# EAGLE board board (EAGLE 5.11)
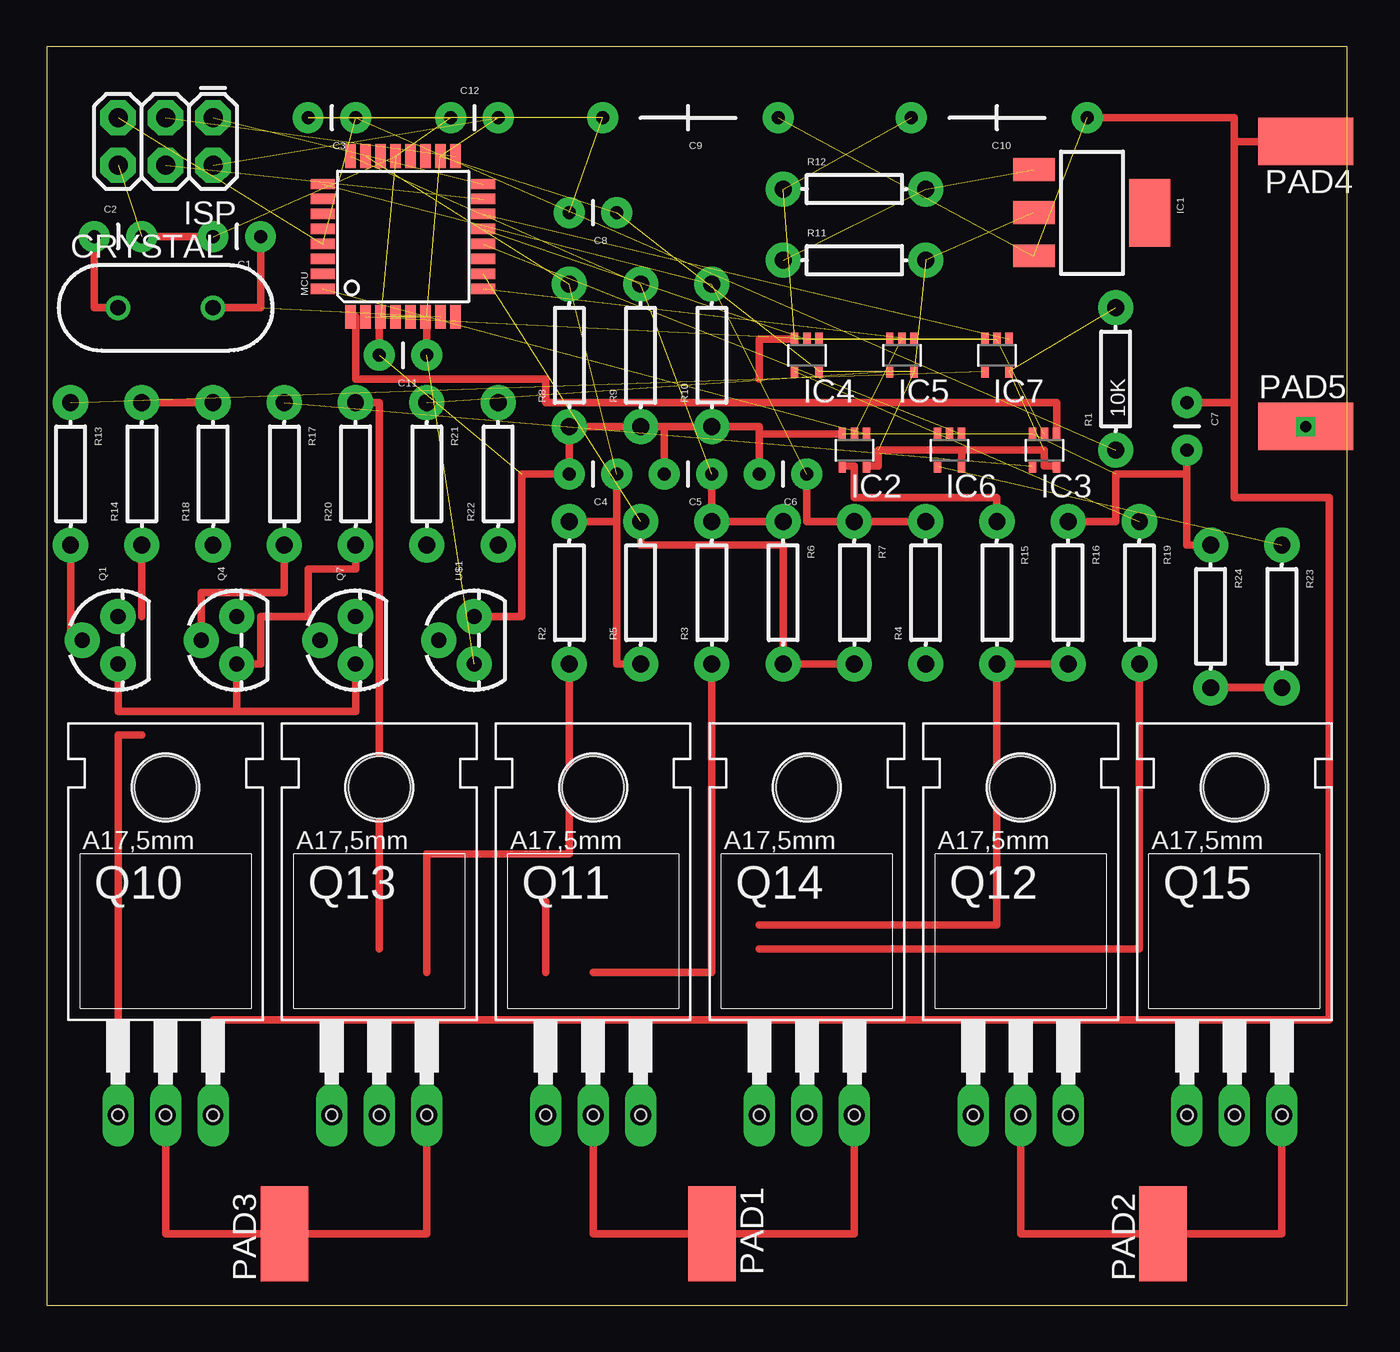
[diagram p0: board, top side]
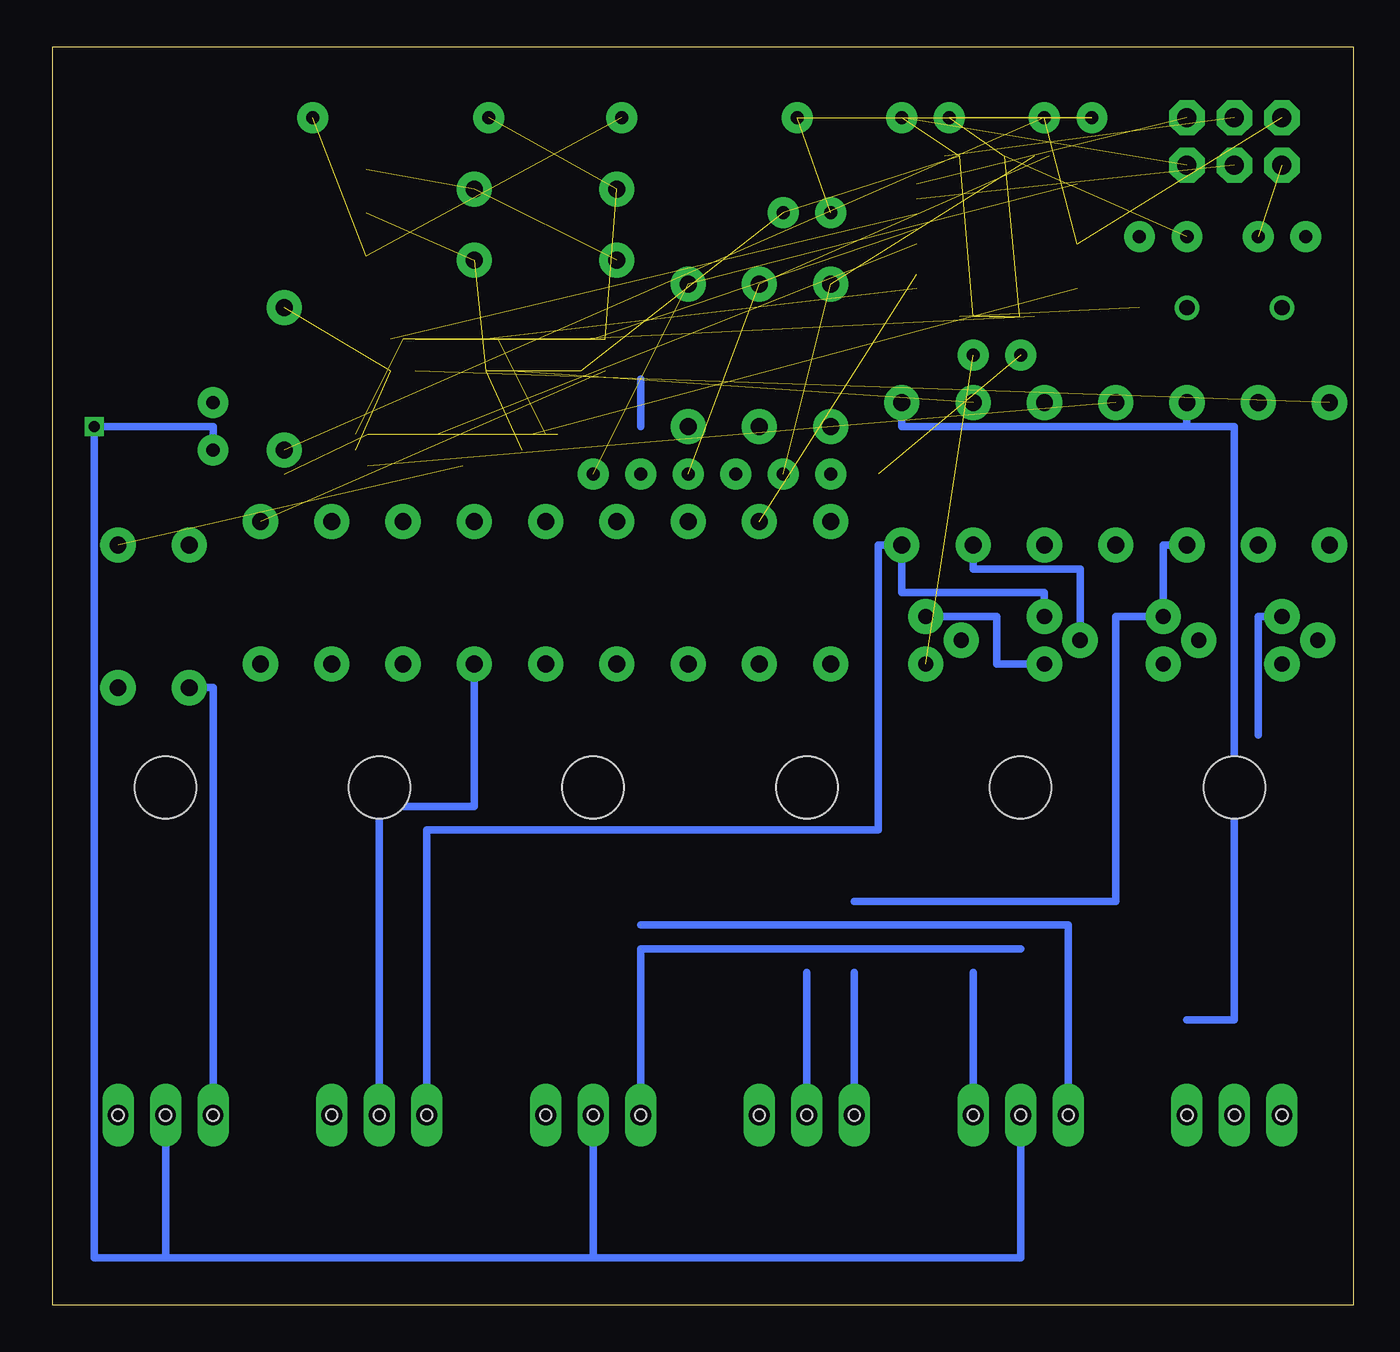
[diagram p1: board, bottom side, seen from below]

Size 69.52 x 67.3 mm. Coordinates in mm from the lower left corner, seen from the top.
Outline: 0,0 69.52,0 69.52,67.3 0,67.3 0,0
Copper layers (1*16): Top 0.035mm / dielectric 1.5mm / Bottom 0.035mm
Design rules "default": minimum track width 10mil, minimum drill 24mil, track to track 8mil, track to pad 8mil, pad to pad 8mil, via to via 8mil, smd to smd 8mil, copper to edge 40mil, drill to drill 8mil, minimum pad ring 10mil, minimum via ring 8mil, stop-mask expansion 4mil, vias tented up to drill 0mil, thermal gap 10mil
Holes 0.6 mm at 43.18,10.16 31.75,10.16 40.64,10.16 38.1,10.16 29.21,10.16 26.67,10.16 49.53,10.16 52.07,10.16 54.61,10.16 20.32,10.16 17.78,10.16 15.24,10.16 8.89,10.16 6.35,10.16 3.81,10.16 63.5,10.16 60.96,10.16 66.04,10.16

## Footprints (pad centres in the part's own frame; a part is rotated, then mirrored left to right if it is on the bottom)
CAP-PTH-SMALL = drill 0.7 pad 1.651 round: 1 0,0; 2 2.54,0
CAP-PTH-LARGE = drill 0.7 pad 1.651 round: 1 -4.826,0; 2 4.572,0
HC49US = drill 0.813 round: 1 -2.54,0; 2 2.54,0
SOT223 = smd 1.219 x 2.235: 1 -2.311,-3.099; 2 0,-3.099; 3 2.311,-3.099 | smd 3.6 x 2.2: 4 0,3.099
SC70-5 = smd 0.4 x 0.7: 1 -0.65,-0.85; 2 0,-0.85; 3 0.65,-0.85; 4 0.65,0.85; 5 -0.65,0.85
2X3 = drill 1.016 pad 1.88 octagon: 1 0,0; 2 0,2.54; 3 2.54,0; 4 2.54,2.54; 5 5.08,0; 6 5.08,2.54
TQFP32-08 = smd 1.27 x 0.559: 1 -4.293,2.8; 2 -4.293,2; 3 -4.293,1.2; 4 -4.293,0.4; 5 -4.293,-0.4; 6 -4.293,-1.2; 7 -4.293,-2; 8 -4.293,-2.8; 17 4.293,-2.8; 18 4.293,-2; 19 4.293,-1.2; 20 4.293,-0.4; 21 4.293,0.4; 22 4.293,1.2; 23 4.293,2; 24 4.293,2.8 | smd 0.559 x 1.27: 9 -2.8,-4.293; 10 -2,-4.293; 11 -1.2,-4.293; 12 -0.4,-4.293; 13 0.4,-4.293; 14 1.2,-4.293; 15 2,-4.293; 16 2.8,-4.293; 25 2.8,4.293; 26 2,4.293; 27 1.2,4.293; 28 0.4,4.293; 29 -0.4,4.293; 30 -1.2,4.293; 31 -2,4.293; 32 -2.8,4.293
SMD2,54-5,08 = smd 2.54 x 5.08: 1 0,0
TO-92 = drill 0.813 pad 1.88 round: 1 -1.27,0; 2 0,1.905; 3 1.27,0
TO220 = drill 1.118 long: 1 -2.54,-6.35; 2 0,-6.35; 3 2.54,-6.35 | hole 3.302: 0,11.176
AXIAL-0.3 = drill 0.9 pad 1.88 round: P$1 -3.81,0; P$2 3.81,0

## Placement (x,y rotation side)
C1  220pF  [CAP-PTH-SMALL]  11.43,57.15 180 top
C2  220pF  [CAP-PTH-SMALL]  2.54,57.15 0 top
C3  10uF  [CAP-PTH-SMALL]  16.51,63.5 180 top
C4  [CAP-PTH-SMALL]  30.48,44.45 180 top
C5  [CAP-PTH-SMALL]  35.56,44.45 180 top
C6  [CAP-PTH-SMALL]  40.64,44.45 180 top
C7  [CAP-PTH-SMALL]  60.96,48.26 270 top
C8  [CAP-PTH-SMALL]  30.48,58.42 180 top
C9  [CAP-PTH-LARGE]  34.29,63.5 180 top
C10  [CAP-PTH-LARGE]  50.8,63.5 180 top
C11  10uF  [CAP-PTH-SMALL]  20.32,50.8 180 top
C12  10uF  [CAP-PTH-SMALL]  21.59,63.5 0 top
CRYSTAL  16Mhz  [HC49US]  6.35,53.34 0 top
IC1  [SOT223]  55.88,58.42 270 top
IC2  74AHC1G08DCK  [SC70-5]  43.18,45.72 180 top
IC3  74AHC1G08DCK  [SC70-5]  53.34,45.72 180 top
IC4  74AHC1G08DCK  [SC70-5]  40.64,50.8 180 top
IC5  74AHC1G08DCK  [SC70-5]  45.72,50.8 180 top
IC6  74AHC1G08DCK  [SC70-5]  48.26,45.72 180 top
IC7  74AHC1G08DCK  [SC70-5]  50.8,50.8 180 top
ISP  AVR_SPI_PRG_6PTH  [2X3]  8.89,63.5 180 top
MCU  ATMEGA168  [TQFP32-08]  19.05,57.15 90 top
PAD1  WIREPADSMD2,54-5,08  [SMD2,54-5,08]  35.56,3.81 180 top
PAD2  WIREPADSMD2,54-5,08  [SMD2,54-5,08]  59.69,3.81 0 top
PAD3  WIREPADSMD2,54-5,08  [SMD2,54-5,08]  12.7,3.81 0 top
PAD4  WIREPADSMD2,54-5,08  [SMD2,54-5,08]  67.31,62.23 90 top
PAD5  WIREPADSMD2,54-5,08  [SMD2,54-5,08]  67.31,46.99 270 top
Q1  [TO-92]  3.81,35.56 90 top
Q4  [TO-92]  10.16,35.56 90 top
Q7  [TO-92]  16.51,35.56 90 top
Q10  BUZ172  [TO220]  6.35,16.51 0 top
Q11  BUZ172  [TO220]  29.21,16.51 0 top
Q12  BUZ172  [TO220]  52.07,16.51 0 top
Q13  BUZ72  [TO220]  17.78,16.51 0 top
Q14  BUZ72  [TO220]  40.64,16.51 0 top
Q15  BUZ72  [TO220]  63.5,16.51 0 top
R1  10K  [AXIAL-0.3]  57.15,49.53 90 top
R2  [AXIAL-0.3]  27.94,38.1 90 top
R3  [AXIAL-0.3]  35.56,38.1 90 top
R4  [AXIAL-0.3]  46.99,38.1 90 top
R5  [AXIAL-0.3]  31.75,38.1 90 top
R6  [AXIAL-0.3]  39.37,38.1 270 top
R7  [AXIAL-0.3]  43.18,38.1 270 top
R8  [AXIAL-0.3]  27.94,50.8 90 top
R9  [AXIAL-0.3]  31.75,50.8 90 top
R10  [AXIAL-0.3]  35.56,50.8 90 top
R11  [AXIAL-0.3]  43.18,55.88 0 top
R12  [AXIAL-0.3]  43.18,59.69 0 top
R13  [AXIAL-0.3]  1.27,44.45 270 top
R14  [AXIAL-0.3]  5.08,44.45 90 top
R15  [AXIAL-0.3]  50.8,38.1 270 top
R16  [AXIAL-0.3]  54.61,38.1 270 top
R17  [AXIAL-0.3]  12.7,44.45 270 top
R18  [AXIAL-0.3]  8.89,44.45 90 top
R19  [AXIAL-0.3]  58.42,38.1 270 top
R20  [AXIAL-0.3]  16.51,44.45 90 top
R21  [AXIAL-0.3]  20.32,44.45 270 top
R22  [AXIAL-0.3]  24.13,44.45 90 top
R23  [AXIAL-0.3]  66.04,36.83 270 top
R24  [AXIAL-0.3]  62.23,36.83 270 top
U$1  TEMPERATURE-SENSOR  [TO-92]  22.86,35.56 90 top

## Library data of the parts
C1-C12 CRYSTAL IC1 ISP MCU Q1 Q4 Q7 R1-R24 U$1 = SparkFun
IC2-IC7 = 74xx-little-us
PAD1-PAD5 = wirepad
Q10-Q15 = transistor-fet

## Nets
ADC0: C4.1 MCU.23 R2.P$2 R5.P$1 R8.P$2
ADC1: C5.1 MCU.24 R3.P$2 R6.P$1 R9.P$2
ADC2: C6.1 MCU.25 R4.P$2 R7.P$1 R10.P$2
ADC3: MCU.26
ADC6: U$1.2
AIN0: MCU.10 R5.P$2 R6.P$2 R7.P$2
BATT+: C7.1 C9.1 C10.1 IC1.3 PAD4.1 Q10.3 Q11.3 Q12.3 R14.P$2 R18.P$2 R22.P$2
GND: C1.2 C2.2 C3.2 C4.2 C5.2 C6.2 C7.2 C8.2 C9.2 C10.2 C11.2 C12.1 IC2.3 IC3.3 IC4.3 IC5.3 IC6.3 IC7.3 ISP.6 MCU.3 MCU.5 MCU.21 PAD5.1 Q1.1 Q4.1 Q7.1 Q13.2 Q14.2 Q15.2 R8.P$1 R9.P$1 R10.P$1 R12.P$1 R16.P$1 R20.P$1 R24.P$1 U$1.3
MISO: ISP.1 MCU.16
MOSI: ISP.4 MCU.15
MOTOR_A: PAD3.1 Q10.2 Q13.3 R2.P$1
MOTOR_B: PAD1.1 Q11.2 Q14.3 R3.P$1
MOTOR_C: PAD2.1 Q12.2 Q15.3 R4.P$1
N$1: Q14.1 R19.P$2 R20.P$2
N$2: C2.1 CRYSTAL.1
N$3: C1.1 CRYSTAL.2 MCU.7
N$4: Q1.2 R13.P$2
N$5: Q1.3 Q10.1 R14.P$1
N$7: IC1.1 R11.P$1 R12.P$2
N$8: Q13.1 R15.P$2 R16.P$2
N$11: Q4.2 R17.P$2
N$12: Q4.3 Q11.1 R18.P$1
N$16: Q7.2 R21.P$2
N$19: Q7.3 Q12.1 R22.P$1
N$21: Q15.1 R23.P$2 R24.P$2
PWM1: IC2.2 IC3.2 IC4.2 IC5.2 IC7.2 MCU.13
PWM_MOTOR_A+: IC7.4 R13.P$1
PWM_MOTOR_A-: IC2.4 R15.P$1
PWM_MOTOR_B+: IC3.4 R17.P$1
PWM_MOTOR_B-: IC4.4 R19.P$1
PWM_MOTOR_C+: IC5.4 R21.P$1
PWM_MOTOR_C-: IC6.4 R23.P$1
RESET: C3.1 ISP.5 MCU.29 R1.P$1
RXD: MCU.30
SCK: ISP.3 MCU.17
SCL: MCU.28
SDA: MCU.27
SEL_MOTORA+: IC7.1 MCU.14
SEL_MOTORA-: IC2.1 MCU.32
SEL_MOTORB+: IC3.1 MCU.1
SEL_MOTORB-: IC4.1 MCU.2
SEL_MOTORC+: IC5.1 MCU.9
SEL_MOTORC-: IC6.1 MCU.12
TXD: MCU.31
VCC: C8.1 C11.1 C12.2 IC1.2 IC2.5 IC3.5 IC4.5 IC5.5 IC6.5 IC7.5 ISP.2 MCU.4 MCU.6 MCU.18 R1.P$2 R11.P$2 U$1.1

## Tracks (layer width: path | path; a pad name or v marks a point on that pad's centre or on a via)
ADC0  (2 unrouted)
  Top 0.406: R5.P$1 30.48,34.29 30.48,41.91 | 30.48,41.91 R2.P$2 | 30.48,41.91 C4.1
ADC1  (2 unrouted)
  Top 0.406: R6.P$1 R3.P$2 C5.1
ADC2  (2 unrouted)
  Top 0.406: R4.P$2 R7.P$1 40.64,41.91 C6.1
AIN0  (1 unrouted)
  Top 0.406: R5.P$2 31.75,40.64 39.37,40.64 R6.P$2 R7.P$2
BATT+  (3 unrouted)
  Top 0.406: 31.75,15.24 Q11.3 | 31.75,15.24 54.61,15.24 | 54.61,15.24 Q12.3 | Q10.3 8.89,15.24 31.75,15.24 | R18.P$2 R14.P$2 | 63.5,62.23 PAD4.1 | 63.5,48.26 63.5,43.18 68.58,43.18 68.58,15.24 54.61,15.24 | 63.5,48.26 63.5,62.23 | 63.5,48.26 C7.1 | C10.1 63.5,63.5 63.5,62.23
  Bottom 0.406: 8.89,46.99 R18.P$2 | 8.89,46.99 24.13,46.99 R22.P$2 | 8.89,46.99 6.35,46.99 6.35,15.24 8.89,15.24
GND  (via drill 0.6)  (18 unrouted)
  Top 0.406: Q7.1 16.51,31.75 10.16,31.75 | 10.16,31.75 Q4.1 11.43,34.29 11.43,36.83 13.97,36.83 13.97,39.37 16.51,39.37 R20.P$1 | Q1.1 3.81,31.75 10.16,31.75 | U$1.3 25.4,36.83 25.4,44.45 C4.2 R8.P$1 R9.P$1 33.02,46.99 | 33.02,46.99 R10.P$1 38.1,46.99 38.1,46.57 | 38.1,46.57 C6.2 | 33.02,46.99 C5.2 | R16.P$1 57.15,41.91 57.15,44.45 60.96,44.45 | C7.2 60.96,44.45 | 60.96,44.45 60.96,40.64 R24.P$1 | MCU.3 17.78,52.86 C11.2 | 38.1,46.57 IC2.3 | IC4.3 38.1,51.65 38.1,49.53 | C2.2 C1.2
  Bottom 0.406: Q13.2 17.78,2.54 40.64,2.54 | 40.64,2.54 63.5,2.54 | 40.64,2.54 Q14.2 | 63.5,2.54 Q15.2 | 63.5,2.54 67.31,2.54 PAD5.1 60.96,46.99 C7.2 | Q7.1 19.05,34.29 19.05,36.83 U$1.3 | 38.1,46.99 38.1,49.53
  other vias: 67.31,46.99
MISO  (1 unrouted)
MOSI  (1 unrouted)
MOTOR_A  (1 unrouted)
  Top 0.406: Q13.3 20.32,3.81 PAD3.1 6.35,3.81 Q10.2 | R2.P$1 27.94,24.13 20.32,24.13 20.32,17.78
  Bottom 0.406: Q13.3 20.32,17.78
MOTOR_B  (1 unrouted)
  Top 0.406: Q11.2 29.21,3.81 PAD1.1 43.18,3.81 Q14.3 | R3.P$1 35.56,17.78 29.21,17.78
  Bottom 0.406: Q11.2 29.21,17.78
MOTOR_C
  Top 0.406: Q12.2 52.07,3.81 PAD2.1 66.04,3.81 Q15.3
  Bottom 0.406: Q12.2 52.07,26.67 46.99,26.67 R4.P$1
N$1  (2 unrouted)
  Top 0.406: R19.P$2 58.42,19.05 38.1,19.05 | R20.P$2 17.78,48.26 17.78,19.05
  Bottom 0.406: Q14.1 38.1,19.05 17.78,19.05
N$2
  Top 0.406: CRYSTAL.1 2.54,53.34 C2.1
N$3  (1 unrouted)
  Top 0.406: C1.1 11.43,53.34 CRYSTAL.2
N$4
  Top 0.406: Q1.2 1.27,35.56 R13.P$2
N$5  (2 unrouted)
  Top 0.406: Q10.1 3.81,30.48 5.08,30.48 | 5.08,36.83 R14.P$1
  Bottom 0.406: Q1.3 5.08,36.83 5.08,30.48
N$7  (2 unrouted)
N$8  (1 unrouted)
  Top 0.406: 38.1,20.32 50.8,20.32 R15.P$2 R16.P$2
  Bottom 0.406: Q13.1 15.24,20.32 38.1,20.32
N$11
  Top 0.406: R17.P$2 12.7,38.1 8.26,38.1 Q4.2
N$12  (2 unrouted)
  Top 0.406: 26.67,17.78 26.67,21.59
  Bottom 0.406: R18.P$1 10.16,40.64 Q4.3 12.7,36.83 12.7,21.59 26.67,21.59 | Q11.1 26.67,17.78
N$16
  Bottom 0.406: R21.P$2 20.32,39.37 15.24,39.37 14.61,39.37 Q7.2
N$19
  Bottom 0.406: Q12.1 49.53,25.4 25.4,25.4 25.4,40.64 R22.P$1 24.13,38.1 16.51,38.1 Q7.3
N$21
  Top 0.406: R24.P$2 R23.P$2
  Bottom 0.406: R24.P$2 60.96,33.02 Q15.1
PWM1  (5 unrouted)
PWM_MOTOR_A+  (1 unrouted)
PWM_MOTOR_A-
  Top 0.406: IC2.4 43.18,44.87 43.18,43.18 50.8,43.18 R15.P$1
PWM_MOTOR_B+  (1 unrouted)
PWM_MOTOR_B-  (1 unrouted)
PWM_MOTOR_C+  (1 unrouted)
PWM_MOTOR_C-  (1 unrouted)
RESET  (3 unrouted)
SCK  (1 unrouted)
SEL_MOTORA+  (1 unrouted)
SEL_MOTORA-  (1 unrouted)
SEL_MOTORB+
  Top 0.406: MCU.1 16.51,52.86 16.51,49.53 26.67,49.53 26.67,48.26 53.34,48.26 53.99,48.26 IC3.1
SEL_MOTORB-  (1 unrouted)
SEL_MOTORC+  (1 unrouted)
SEL_MOTORC-  (1 unrouted)
VCC  (13 unrouted)
  Top 0.406: IC2.5 44.45,44.87 44.45,45.72 48.91,45.72 | 48.91,45.72 IC6.5 | IC3.5 53.34,44.87 53.34,45.72 48.91,45.72 | MCU.6 20.32,52.86 C11.1